# Altium PCB dspic30f2023.PcbDoc
Units mil, origin at the board's own origin, x right, y up, seen from the top; angles counter-clockwise.
Board outline 2885.83 x 1771.65 mil, 2 copper layers (Top Layer, Bottom Layer); 42 components, 52 nets, 185 pads, 57 vias.
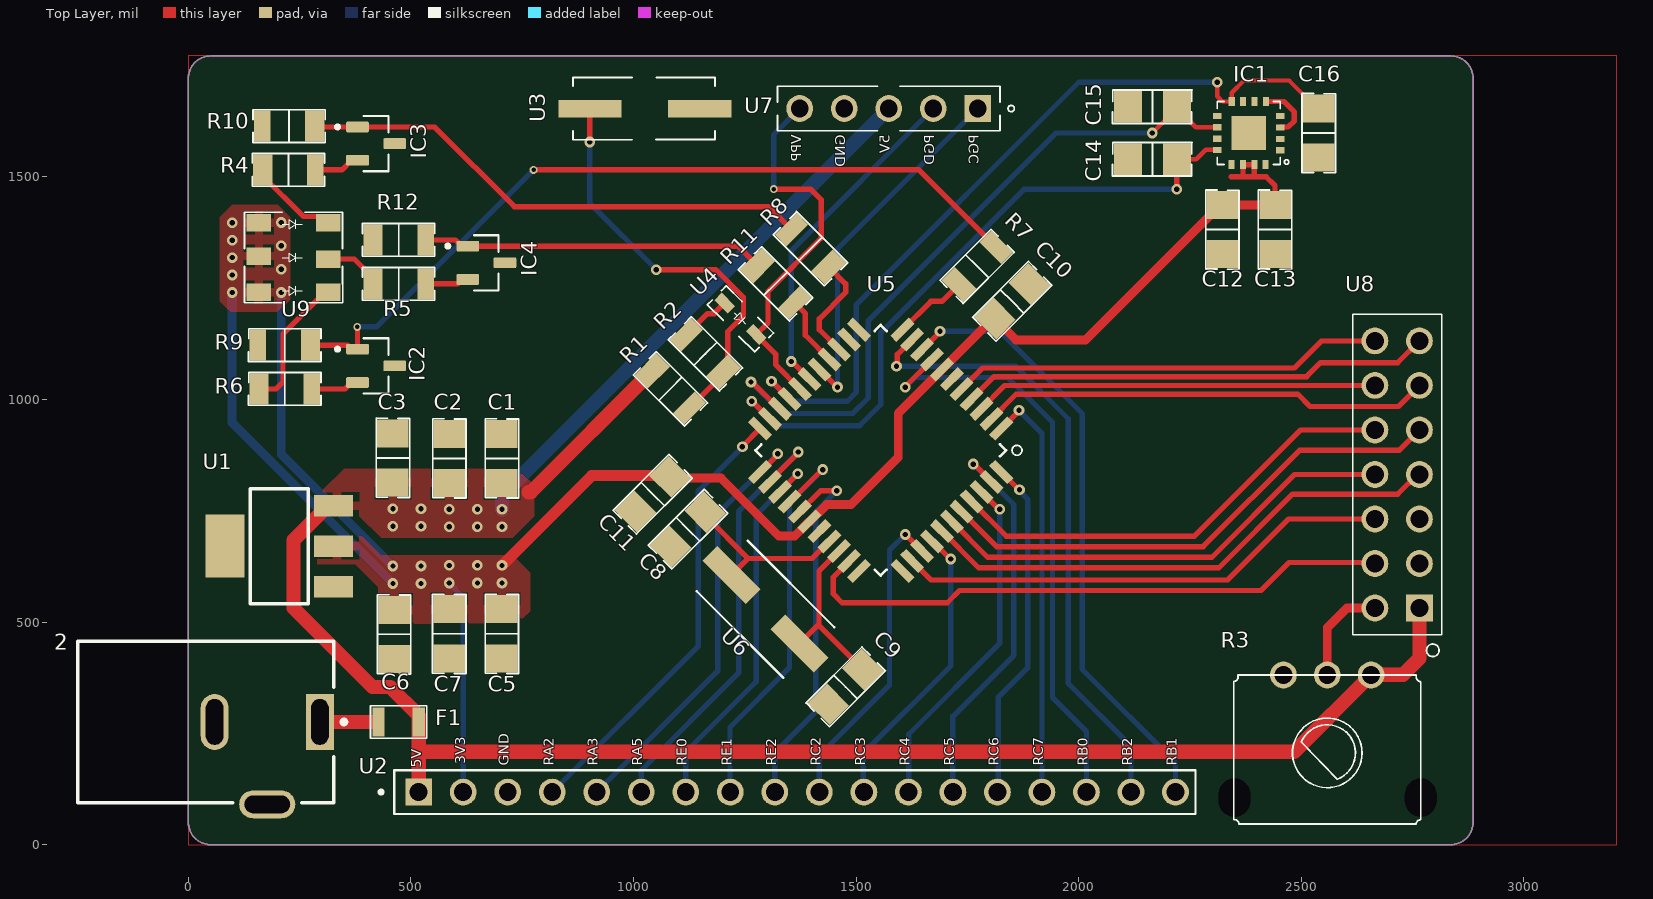
[diagram p0: Top Layer view]
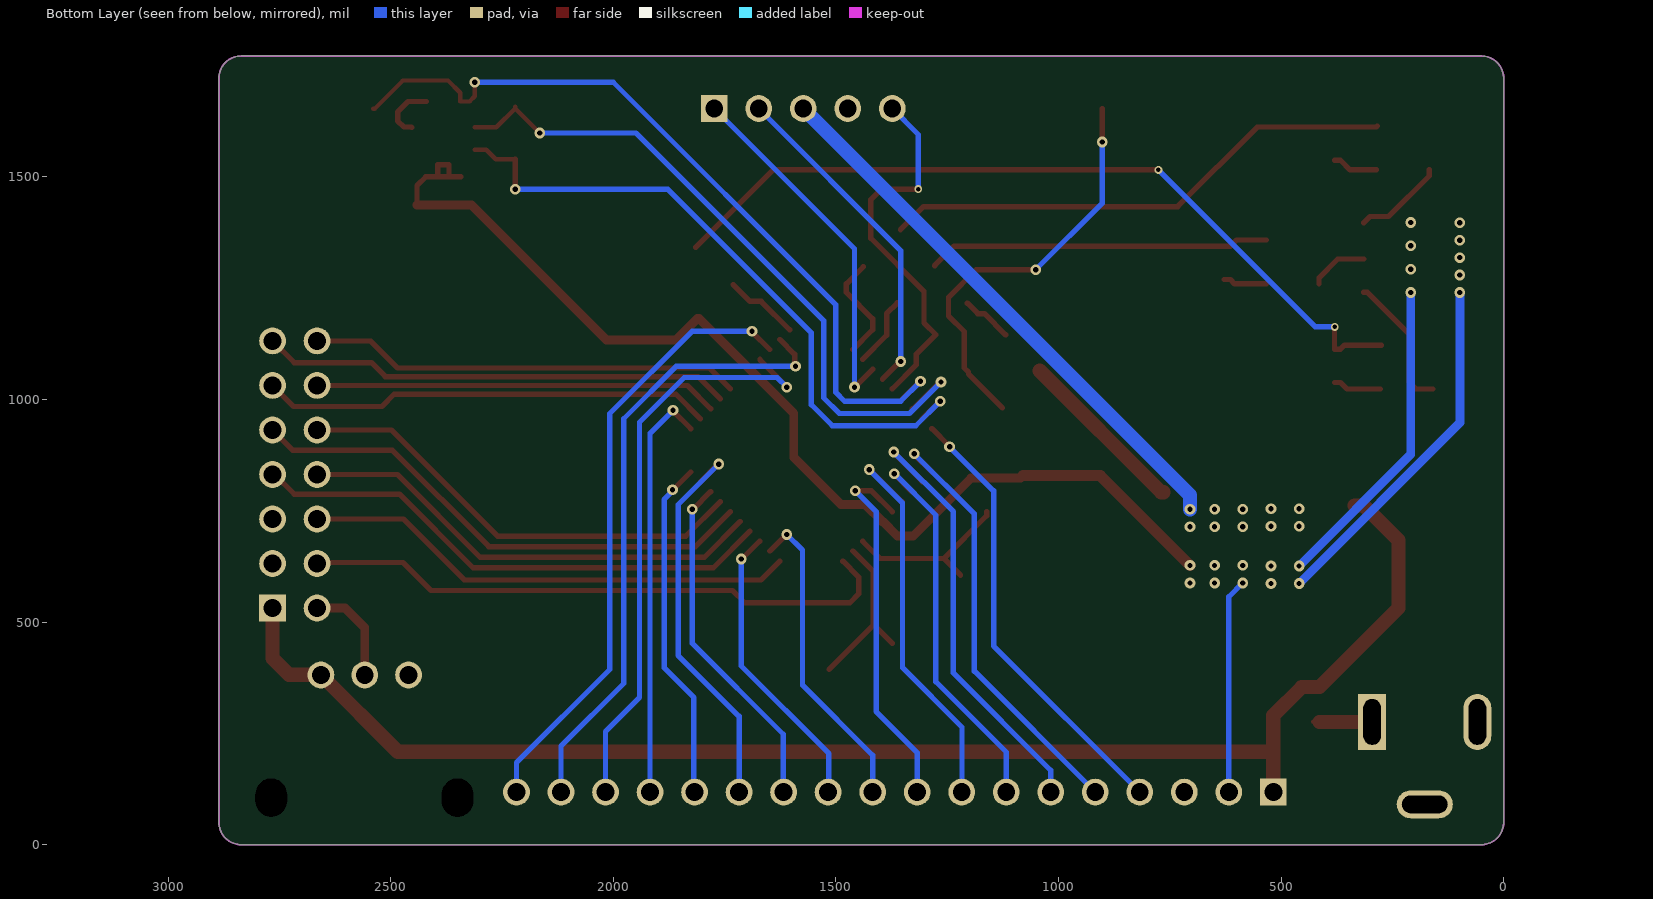
[diagram p1: Bottom Layer view, seen from below]
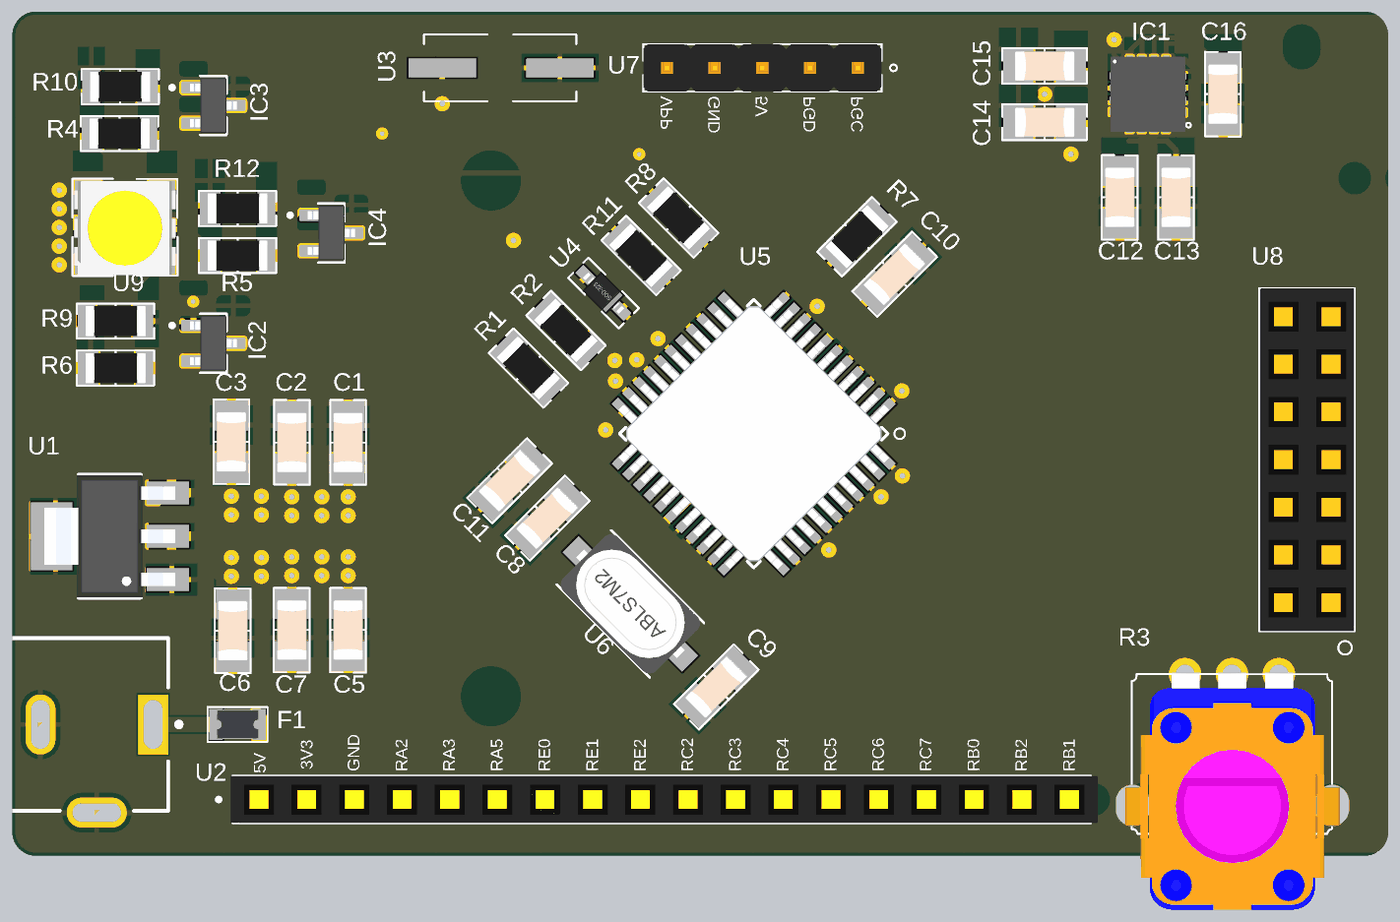
[diagram p2: 3D render of the assembled board from above, using the file's embedded part models]

## Layer stack, top to bottom
Top Solder: solder mask 0.4, Solder Resist, Dk 3.5
Top Layer: signal copper 1.4
Dielectric 1: dielectric 12.6, FR-4, Dk 4.8
Bottom Layer: signal copper 1.4
Bottom Solder: solder mask 0.4, Solder Resist, Dk 3.5

## Board outline
0,50 0,1721.65 cw(c50,1721.65) 50,1771.65 89.37,1771.65 90.55,1771.65 2835.83,1771.65 cw(c2835.83,1721.65) 2885.83,1721.65 2885.83,50 cw(c2835.83,50) 2835.83,0 118.11,0 50,0 cw(c50,50)

## Design rules (kind name [scope] priority, off if disabled: settings)
Clearance [All] p1: gap=4 ignorepadtopadclearanceinfootprint=FALSE
PolygonConnect [All] p1: thpad.connectstyle=Relief thpad.reliefconductorwidth=15.75 thpad.reliefentries=4 thpad.polygonreliefangle="90 Angle" thpad.airgapwidth=9.84 smdpad.connectstyle=Relief smdpad.reliefconductorwidth=19.68 smdpad.reliefentries=4 smdpad.polygonreliefangle="90 Angle" smdpad.airgapwidth=5.91 via.connectstyle=Direct via.reliefconductorwidth=10 via.reliefentries=4 via.polygonreliefangle="90 Angle" via.airgapwidth=10
RoutingVias [All] p1: holewidth=9.84 width=17.72 viastyle="Through Hole" minholewidth=7.87 minwidth=17.72 maxholewidth=39.37 maxwidth=62.99
SolderMaskExpansion [All] p1: expansion=4 istentingtop=FALSE
Width [All] p1: maxlimit=39.37 minlimit=4 preferedwidth=7.87
30 further rules are at their usual default settings.

## Classes and differential pairs
component class Sensor&Screen: C12 C13 C14 C15 C16 IC1 IC2 IC3 IC4 R3 R4 R5 R6 R7 R8 R9 R10 R11 R12 U8 U9
component class Power&USB: 2 C1 C2 C3 C5 C6 C7 C8 C9 C10 C11 F1 R1 R2 U1 U3 U4 U6
component class MCU-PINS: U2 U5 U7

## Components (designator, comment, footprint, x,y, rotation, side; value= is the part's Value field where it differs from the comment)
2 "PJ-102A" FP-PJ-102A-MFG 39.37,275.59 r90 top (schematic designator J1)
C1 "C" PCBComponent_1#1 704.33,867.44 r270 top
C2 "C" PCBComponent_1#1 586.22,867.44 r270 top
C3 "C" PCBComponent_1#1 459.45,868.74 r270 top
C5 "C" PCBComponent_1#1 704.33,473.74 r90 top
C6 "C" PCBComponent_1#1 462.44,472.44 r90 top
C7 "C" PCBComponent_1#1 586.22,473.74 r90 top
C8 "22pF" PCBComponent_1#1 1122.05,708.66 r225 top
C9 "22pF" PCBComponent_1#1 1476.38,354.33 r225 top
C10 "10uF" PCBComponent_1#1 1850.39,1220.47 r225 top
C11 "22uF" PCBComponent_1#1 1043.31,787.4 r45 top
C12 "10uF" PCBComponent_1#1 2322.83,1381.89 r90 top
C13 "10uF" PCBComponent_1#1 2440.94,1381.89 r90 top
C14 "0.1uF" PCBComponent_1#1 2165.35,1539.37 r0 top
C15 "0.1uF" PCBComponent_1#1 2165.35,1657.48 r0 top
C16 "0.1uF" PCBComponent_1#1 2539.37,1598.43 r90 top
F1 "FUSE" PCBComponent_1#2 472.44,275.59 r0 top
IC1 "ANALOG-ACCELOMETER" PCBComponent_1#3 2381.89,1598.43 r180 top
IC2 "BSS138-7-F" PCBComponent_1#4 421.69,1075.6 r0 top
IC3 "BSS138-7-F" PCBComponent_1#4 421.69,1574.8 r0 top
IC4 "BSS138-7-F" PCBComponent_1#4 669.3,1306.95 r0 top
R1 "10K" PCBComponent_1#5 1082.68,1023.62 r315 top
R2 "10K" PCBComponent_1#5 1161.42,1102.36 r135 top
R3 "POT-100K" PCBComponent_1#6 2559.06,228.35 r180 top
R4 "R" PCBComponent_1#5 224.84,1515.75 r0 top
R5 "R" PCBComponent_1#5 472.44,1259.84 r0 top
R6 "R" PCBComponent_1#5 216.54,1023.62 r0 top
R7 "R" PCBComponent_1#5 1771.65,1299.21 r45 top
R8 "R" PCBComponent_1#5 1397.64,1338.58 r135 top
R9 "R" PCBComponent_1#5 216.54,1122.05 r180 top
R10 "R" PCBComponent_1#5 226.22,1614.17 r180 top
R11 "R" PCBComponent_1#5 1318.9,1259.84 r315 top
R12 "R" PCBComponent_1#5 472.44,1358.27 r0 top
U1 "3.3V-REG" PCBComponent_1#7 204.33,670.59 r180 top
U2 "HEADER-FEMALE" PCBComponent_1#8 1367.32,118.11 r0 top
U3 "PUSH-BUTTON" PCBComponent_1#9 1023.62,1653.54 r0 top
U4 "DİODE-SOD-323" PCBComponent_1#10 1240.16,1181.1 r315 top
U5 "PIC18f452-TQFP" PCBComponent_1#11 1555.12,885.83 r225 top
U6 "Crystals-8MHz" PCBComponent_1#12 1299.21,531.5 r135 top
U7 "MALE-HEADER" PCBComponent_1#13 1573.23,1653.54 r180 top
U8 "LCD-DİSPLAY" PCBComponent_1#14 2715.36,831.5 r90 top
U9 "RGB-LED" PCBComponent_1#15 236.22,1318.9 r0 top

## Footprints (in the part's own frame and the unit in brackets; to place one, negate y for a bottom-side part, rotate by r counter-clockwise, add the part's x,y. Pads: shape width x height; smd on the part's side, far side on the other; paste and mask are expansions set on the pad)
FP-PJ-102A-MFG [mm]
  rect 3.2x1.6 hole 1 slot 2.6 at 0 deg paste-1000 mask+0: 1(0,-6.5)
  rrect100% 3.2x1.6 hole 1 slot 2.6 at 0 deg paste-1000 mask+0: 2(0,-0.5)
  rrect100% 1.6x3.2 hole 2.6 slot 1 at 0 deg paste-1000 mask+0: 3(-4.7,-3.5)
  silkscreen extent -4.6,-8 4.6,7.3
PCBComponent_1#1 [mm]
  rect 1.6x1.8 smd: 1(-1.4,0) 2(1.4,0)
  silkscreen extent -2.27,-0.95 2.26,0.95, body extent -1.6,-0.8 1.6,0.8, height 0.81
PCBComponent_1#2 [mm]
  rect 0.7x1.65 smd: 8(-1.15,0) 9(1.15,0)
  silkscreen extent -1.6,-0.92 1.6,0.93, body extent -1.1,-0.77 1.1,0.77, height 0.5
PCBComponent_1#3 [mm]
  rect 1.95x1.95 smd: 0(0,0)
  rect 0.5x0.35 smd: 1(-1.8,0.979) 2(-1.8,0.329) 3(-1.8,-0.321) 4(-1.8,-0.971) 9(1.8,-0.979) 10(1.8,-0.329) 11(1.8,0.321) 12(1.8,0.956)
  rect 0.35x0.5 smd: 5(-0.979,-1.8) 6(-0.329,-1.8) 7(0.321,-1.8) 8(0.971,-1.8) 13(0.979,1.8) 14(0.329,1.8) 15(-0.321,1.8) 16(-0.956,1.8)
  silkscreen extent -2.29,-1.8 1.8,1.8, body extent -2,-2 2,2, height 1.5
PCBComponent_1#4 [mm]
  rrect25% 1.3x0.61 smd: 1(-1.06,0.95) 2(-1.06,-0.95) 3(1.06,0)
  silkscreen extent -2.3,-1.58 0.7,1.58, body extent -1.25,-1.46 1.25,1.46, height 1.12
PCBComponent_1#5 [mm]
  rect 1.09x1.77 smd: 1(-1.465,0)
  rect 0.94x1.77 smd: 2(1.54,0)
  silkscreen extent -2.06,-0.93 2.06,0.93, body extent -1.6,-0.8 1.6,0.8, height 0.61
PCBComponent_1#6 [mm]
  round 1.53 hole 1.02: 1(-2.48,-3.881) 2(0.02,-3.881) 3(2.52,-3.881)
  rrect100% 0x0 hole 1.8 slot 2.2 at 90 deg: S3(-5.314,3.119) S3(5.314,3.119)
  Top Layer lines w0.1: -2.48,-3.881 -2.52,-3.881
  silkscreen extent -5.31,-3.89 5.36,4.63, body extent -5.7,-3.98 5.7,8.67, height 24.8
PCBComponent_1#7 [mm]
  rect 2.235x1.219 smd: 1(-3.099,2.311) 2(-3.099,0) 3(-3.099,-2.311)
  rect 2.2x3.6 smd: 1(3.099,0)
  silkscreen extent -1.65,-3.28 1.65,3.28, body extent -3.5,-3.25 3.5,3.25, height 1.8
PCBComponent_1#8 [mm]
  rect 1.53x1.53 hole 1.02: 1(-21.59,0)
  round 1.53 hole 1.02: 2(-19.05,0) 3(-16.51,0) 4(-13.97,0) 5(-11.43,0) 6(-8.89,0) 7(-6.35,0) 8(-3.81,0) 9(-1.27,0) 10(1.27,0) 11(3.81,0) 12(6.35,0) 13(8.89,0) 14(11.43,0) 15(13.97,0) 16(16.51,0) 17(19.05,0) 18(21.59,0)
  silkscreen extent -23.83,-1.25 22.73,1.25, body extent -23.11,-1.25 23.11,1.25, height 5
PCBComponent_1#9 [mm]
  rect 3.6x1 smd: 1(-3.092,0) 2(3.175,0)
  silkscreen extent -4.06,-1.78 4.05,1.78, body extent -4,-1.75 4,1.75, height 2.5
PCBComponent_1#10 [mm]
  rect 1.1x0.6 smd: 1(-1.27,0) 2(1.27,0)
  silkscreen extent -1.9,-0.76 1.9,0.76, body extent -1.35,-0.72 1.35,0.72, height 1.17
PCBComponent_1#11 [mm]
  rect 1.473x0.483 smd: 1(-5.74,3.988) 2(-5.74,3.2) 3(-5.74,2.388) 4(-5.74,1.6) 5(-5.74,0.787) 6(-5.74,0) 7(-5.74,-0.787) 8(-5.74,-1.6) 9(-5.74,-2.388) 10(-5.74,-3.2) 11(-5.74,-3.988) 23(5.74,-3.988) 24(5.74,-3.2) 25(5.74,-2.388) 26(5.74,-1.6) 27(5.74,-0.787) 28(5.74,0) 29(5.74,0.787) 30(5.74,1.6) 31(5.74,2.388) 32(5.74,3.2) 33(5.74,3.988)
  rect 0.483x1.473 smd: 12(-3.988,-5.74) 13(-3.2,-5.74) 14(-2.388,-5.74) 15(-1.6,-5.74) 16(-0.787,-5.74) 17(0,-5.74) 18(0.787,-5.74) 19(1.6,-5.74) 20(2.388,-5.74) 21(3.2,-5.74) 22(3.988,-5.74) 34(3.988,5.74) 35(3.2,5.74) 36(2.388,5.74) 37(1.6,5.74) 38(0.787,5.74) 39(0,5.74) 40(-0.787,5.74) 41(-1.6,5.74) 42(-2.388,5.74) 43(-3.2,5.74) 44(-3.988,5.74)
  silkscreen extent -5.78,-5.05 5.05,5.78, body extent -6,-6 6,6, height 1.19
PCBComponent_1#12 [mm]
  rect 3.5x1.2 smd: 1(-2.75,0.1) 2(2.75,0.1)
  silkscreen extent -3.5,-1.95 3.5,2.15, body extent -3.8,-1.95 3.8,2.15, height 1.9
PCBComponent_1#13 [mm]
  rect 1.53x1.53 hole 1.02: 1(-5.08,0)
  round 1.53 hole 1.02: 2(-2.54,0) 3(0,0) 4(2.54,0) 5(5.08,0)
  silkscreen extent -7.16,-1.27 6.35,1.27, body extent -6.35,-1.27 6.35,1.27, height 8.89
PCBComponent_1#14 [mm]
  rect 1.53x1.53 hole 1.02: 1(-7.62,-1.27)
  round 1.53 hole 1.02: 2(-7.62,1.27) 3(-5.08,-1.27) 4(-5.08,1.27) 5(-2.54,-1.27) 6(-2.54,1.27) 7(0,-1.27) 8(0,1.27) 9(2.54,-1.27) 10(2.54,1.27) 11(5.08,-1.27) 12(5.08,1.27) 13(7.62,-1.27) 14(7.62,1.27)
  silkscreen extent -10.39,-2.54 9.14,2.54, body extent -9.14,-2.52 9.14,2.48, height 8.5
PCBComponent_1#15 [mm]
  rect 1.4x1 smd: 1(1.976,-1.987) 2(1.978,-0.089) 3(1.973,1.988) 4(-1.976,1.987) 5(-1.976,0.082) 6(-1.98,-1.986)
  silkscreen extent -2.8,-2.58 2.8,2.59, body extent -2.7,-2.54 2.7,2.46, height 1.68

## Part data
2: library part CMP-2000-06899-2, "CONN PWR JACK 2X5.5MM SOLDER", Current Rating=2.5A, Manufacturer=CUI, Temperature="-25°C to +85°C", Temperature Range High=+85°C, Temperature Range Low=-25°C, Voltage=24V, Automotive=No, Category=Conn, ComponentLink2Description=Datasheet, ComponentLink2URL=http://www.cui.com/product/resource/pj-102a.pdf, Conn Gender=Male, Conn Orientation="Right Angle", Contact Material=Tin,Nickel, Device Class L1=Connectors, Device Class L2="Power Connectors", Device Class L3=unset, Digikey Description="CONN PWR JACK 2X5.5MM SOLDER", Height=11.2mm, Industry Recognized Mating Diameter="2.10mm ID (0.083\"), 5.50mm OD (0.217\")", Lead Free=Yes, Manufacturer Part Number=PJ-102A, Mouser Description="DC Power Connectors Power Jacks", Number Of Contacts=3, Number of Positions/Contacts="2 Conductors, 3 Contacts", Octopart=https://octopart.com/pj-102a-cui-286936, Package=PJ-102A, RoHS=TRUE, Voltage Rating=24V
C1 C2 C3 C5 C6 C7 C8 C9 C10 C11 C12 C13 C14 C15 C16: library part 1206-CAPACİTOR
F1 IC2 IC3 IC4: library part Component_1
IC1: library part ADXL33X
R1 R2 R4 R5 R6 R7 R8 R9 R10 R11 R12: library part 1206-RESİSTOR
R3: library part L-KLS4-R0902N-B100K-L25-
U1: library part LD1117AG-33-AA3-A-R
U2: library part L-KLS1-208B-4.0-1-18-S
U3: library part DS1042-03-2-1-KKA-160-10
U4: library part 1N4148WS-HT
U6: library part Crystals-8MHz-SMD
U7: library part 5-PINS-MALE-HEADER
U8: library part 0802A
U9: library part FYLS-5050NRGB

## Via types
v1: diameter 24, hole 11.81, Top Layer to Bottom Layer, 29 vias
v2: diameter 24, hole 12, Top Layer to Bottom Layer, 25 vias
v3: diameter 17.72, hole 9.84, Top Layer to Bottom Layer, 3 vias

## Nets (pads, with @x,y where several pads share a name; then routed paths per layer and width w, separated by ;. In a path a pad name is that pad's centre, name@x,y a point inside that pad or via, vN(x,y) a via of type N, cw(c..) or ccw(c..) an arc to the next point about the centre after c; other vN are vias at no path point)
3V3: C5.2 C6.2 C7.2 C10.2 C11.2 C12.2 C13.2 IC1.14 IC1.15 U1.2 U2.2 U5.7 U5.28 U9.4 U9.5 U9.6 | length 4514.6
  Top Layer w12: C10.2@1806.95,1181.5 C10.2 ; 2342.52,1500 2421.26,1500 2440.94,1480.32 C13.2 ; 2368.68,1501.35 2368.94,1501.6 IC1.14 IC1.15 2394.53,1500.89
  Top Layer w20: C11.2@1079.5,829.16 C11.2 1085.07,823.59 1196.09,823.59 1326.77,692.91 1361.5,692.91 1394.6,726.02 U5.28 1396.02,726.02 1433.78,763.78 1488.19,763.78 1594.49,870.08 1594.49,969.04 U5.7 C10.2@1806.95,1181.5 ; C10.2 1859.06,1133.86 2015.75,1133.86 2318.9,1437.01 C12.2 C13.2
  Top Layer w25: v1(704.33,627.28) 906.21,829.16 C11.2@1079.5,829.16
  Bottom Layer w12: v1(586.22,587.91) 617.32,556.81 U2.2
  Bottom Layer w20: v1(98.43,1240.16) 98.43,947.64 v1(459.45,586.61) ; v1(208.66,1240.16) 208.66,876.77 v1(459.45,625.98)
  other v1: 522.44,586.61 649.21,587.91 704.33,587.91 522.44,625.98 586.22,627.28 649.21,627.28 98.43,1279.4 208.66,1292.65 98.43,1318.64 208.66,1345.14 98.43,1357.88 98.43,1397.12 208.66,1397.64
BLUE_LED: R7.1 U5.11 | length 169.1
  Top Layer w12: U5.11 1667.73,1220.47 1692.91,1220.47 R7.1
D0: U5.38 U8.7 | length 1193.1
  Top Layer w12: U5.38 1775.06,622.05 2314.96,622.05 2480.31,787.4 2716.54,787.4 2760.63,831.5 U8.7
D1: U5.39 U8.8 | length 1060.7
  Top Layer w12: U5.39 1795.27,645.67 2299.21,645.67 2485.04,831.5 U8.8
D2: U5.40 U8.9 | length 1169.7
  Top Layer w12: U5.40 1815.49,669.29 2279.53,669.29 2496.06,885.83 2719.69,885.83 U8.9
D3: U5.41 U8.10 | length 1036.9
  Top Layer w12: U5.41 1837.13,692.91 2259.84,692.91 2498.43,931.5 U8.10
D4: U5.2 U8.11 | length 1015.2
  Top Layer w12: U5.2 1859.29,1011.81 2492.13,1011.81 2519.68,984.25 2718.11,984.25 U8.11
D5: U5.3 U8.12 | length 905.6
  Top Layer w12: U5.3 1833.72,1031.5 U8.12
D6: U5.4 U8.13 | length 1059.9
  Top Layer w12: U5.4 1809.57,1051.18 2511.81,1051.18 2543.31,1082.68 2716.54,1082.68 U8.13
D7: U5.5 U8.14 | length 973.2
  Top Layer w12: U5.5 1784,1070.87 2484.25,1070.87 2544.88,1131.5 U8.14
E: U5.35 U8.6 | length 1113.9
  Top Layer w12: U5.35 1668.26,594.49 2334.65,594.49 2471.65,731.5 U8.6
GND: 2.2 2.3 C1.1 C2.1 C3.1 C5.1 C6.1 C7.1 C8.2 C9.2 C10.1 C11.1 C12.1 C13.1 C14.1 C15.1 C16.1 IC1.3 IC1.5 IC1.6 IC1.7 IC2.3 IC3.3 IC4.3 R3.3 R9.2 R10.2 R12.1 U1.1 U2.3 U3.2 U5.6 U5.29 U7.4 U8.3 U8.5 | length 131
  Top Layer w12: IC1.5 2460.63,1669.29 2484.25,1645.67 2484.25,1625.98 2470.21,1611.94 2453.64,1611.94 IC1.3
GREEN_LED: R11.2 U5.15 | length 159.1
  Top Layer w12: R11.2 1385.83,1192.91 1385.83,1144.21 U5.15
NetC8_1: C8.1 U5.30 U6.2 | length 396.4
  Top Layer w12: C8.1 1161.02,738.99 1257.31,642.71 ; U6.2 1257.31,642.71 ; U5.30 1401.09,642.71 1257.31,642.71
NetC9_1: C9.1 U5.31 U6.1 | length 387.6
  Top Layer w12: U6.1 1416.72,495.89 ; U5.31 1416.72,614.49 1416.72,495.89 ; C9.1 1416.72,491.94 1416.72,495.89
NetF1_8: 2.1 F1.8 | length 118.1
  Top Layer w32: 2.1 413.38,275.59
NetIC2_1: IC2.1 R7.2 R9.1 | length 1812.8
  Top Layer w12: R9.1 357.33,1122.05 366.38,1113 IC2.1 379.96,1162.51 v3(379.47,1163) ; v3(775.59,1515.75) 1640.86,1515.75 R7.2
  Bottom Layer w12: v3(379.47,1163) 422.84,1163 v3(775.59,1515.75)
NetIC2_2: IC2.2 R6.2 | length 108.8
  Top Layer w12: R6.2 351.8,1023.62 366.38,1038.2 IC2.2
NetIC3_1: IC3.1 R8.2 R10.1 | length 1167.3
  Top Layer w12: R10.1 285.87,1612.2 IC3.1 553.15,1612.2 732.28,1433.07 1303.15,1433.07 R8.2
NetIC3_2: IC3.2 R4.2 | length 103.5
  Top Layer w12: R4.2 344.72,1515.75 366.38,1537.4 IC3.2
NetIC4_1: IC4.1 R11.1 R12.2 | length 768.9
  Top Layer w12: R12.2 600.07,1358.27 613.99,1344.35 IC4.1 1234.39,1344.35 R11.1
NetIC4_2: IC4.2 R5.2 | length 98.5
  Top Layer w12: R5.2 604.28,1259.84 613.99,1269.55 IC4.2
NetR1_2: R1.2 R2.1 U3.1 | length 944.5
  Top Layer w12: v2(901.89,1578.43) U3.1 ; v2(1051.18,1291.34) 1185.04,1291.34 1247,1229.38 1247,1187.94 1211.67,1152.61 1211.67,1071.04 R2.1 1202.2,1057.4 R1.2
  Bottom Layer w12: v2(901.89,1578.43) 901.89,1440.63 v2(1051.18,1291.34)
NetR2_2: R2.2 U4.1 | length 115.8
  Top Layer w12: R2.2 1166.22,1192.91 1181.1,1192.91 1204.65,1216.46 U4.1
NetR3_2: R3.2 U8.2 | length 231.6
  Top Layer w20: R3.2 2558.27,487.4 2602.36,531.5 U8.2
NetR4_1: R4.1 U9.3 | length 203.7
  Top Layer w12: R4.1 167.16,1502.36 258.69,1410.83 300.2,1410.83 U9.3
NetR5_1: R5.1 U9.2 | length 131.5
  Top Layer w12: U9.2 372.62,1315.38 414.76,1273.23 R5.1
NetR6_1: R6.1 U9.1 | length 308.2
  Top Layer w12: R6.1 196.85,1023.62 212.6,1039.37 212.6,1147.12 306.15,1240.67 U9.1
PGC: U5.16 U7.1 | length 812.4
  Top Layer w12: U5.16 v2@1456.97,1027.81
  Bottom Layer w12: v2(1458.21,1027.81) 1458.21,1338.53 U7.1
PGD: U5.17 U7.2 | length 756.5
  Top Layer w12: v2@1355.57,1085.37 U5.17
  Bottom Layer w12: v2(1354.33,1085.37) 1354.33,1334.64 U7.2
RA2/N2/VREF-: U2.4 U5.22 | length 1008.7
  Top Layer w12: v2@1244.55,894.88 U5.22
  Bottom Layer w12: U2.4 1145.67,446.46 1145.67,794.75 v2(1244.55,893.64)
RA3/AN3/VREF+: U2.5 U5.23 | length 984.6
  Top Layer w12: U5.23 v2@1324.04,876.78
  Bottom Layer w12: U2.5 1188.98,389.76 1188.98,742.96 v2(1324.04,878.02)
RA5/AN4/S\S\/LVDIN: U2.6 U5.24 | length 1003.1
  Top Layer w12: U5.24 1306.22,816.57 1370.08,880.43 v2(1370.08,881.89)
  Bottom Layer w12: U2.6 1017.32,166.93 1236.22,385.83 1236.22,748.03 v2(1370.08,881.89)
RB0/INT0: U2.16 U5.8 | length 1331.1
  Top Layer w12: v2(1610.24,1027.56) 1610.24,1028.8 1670.38,1088.94 U5.8
  Bottom Layer w12: v2(1610.24,1027.56) 1631.88,1049.2 1840.56,1049.2 1940.94,948.82 1940.94,330.71 2017.32,254.33 U2.16
RB1/INT1: U2.18 U5.9 | length 1389.3
  Top Layer w12: U5.9 v2@1688.2,1151.84
  Bottom Layer w12: v2(1688.2,1153.08) 1823.06,1153.08 2007.87,968.27 2007.87,393.7 2217.32,184.25 U2.18
RB2/INT2: U2.17 U5.10 | length 1406.3
  Top Layer w12: v2(1590.55,1074.8) 1592.59,1076.85 1592.59,1101.49 U5.10
  Bottom Layer w12: v2(1590.55,1074.8) 1858.27,1074.8 1976.38,956.69 1976.38,362.2 2117.32,221.26 U2.17
RC2/CCP1: U2.10 U5.36 | length 712.3
  Top Layer w12: v2(1610.24,696.85) 1610.7,696.85 1647.99,659.55 U5.36
  Bottom Layer w12: U2.10 1417.32,200.79 1574.8,358.27 1574.8,661.42 v2(1610.24,696.85)
RC3/SCK/SCL: U2.11 U5.37 | length 664.5
  Top Layer w12: U5.37 1671.62,681.47 1711.36,641.73 v2(1712.6,641.73)
  Bottom Layer w12: U2.11 1515.75,119.69 1515.75,204.72 1712.6,401.57 v2(1712.6,641.73)
RC4/SDI/SDA: U2.12 U5.42 | length 776.7
  Top Layer w12: U5.42 1781.39,792.95 v2@1821.13,753.21
  Bottom Layer w12: U2.12 1618.11,118.9 1618.11,248.03 1822.37,452.29 v2(1822.37,753.21)
RC5/SDO: U2.13 U5.43 | length 887.5
  Top Layer w12: v2@1764.28,854.86 U5.43
  Bottom Layer w12: U2.13 1717.32,288.19 1854.33,425.2 1854.33,763.56 v2(1763.04,854.86)
RC6/TX/CK: U2.14 U5.44 | length 771.6
  Top Layer w12: U5.44 v2@1865.68,797.3
  Bottom Layer w12: U2.14 1818.9,119.68 1818.9,330.71 1885.83,397.64 1885.83,775.14 1866.92,794.05 v2(1866.92,797.3)
RC7/RX/DT: U2.15 U5.1 | length 935.1
  Top Layer w12: U5.1 v2@1865.68,974.36
  Bottom Layer w12: v2(1865.68,975.6) 1917.32,923.95 U2.15
RE0/AN5/R\D\: U2.7 U5.25 | length 875.6
  Top Layer w12: U5.25 v2@1368.58,832.23
  Bottom Layer w12: U2.7 1117.32,207.88 1275.59,366.14 1275.59,740.48 v2(1368.58,833.47)
RE1/AN6/W\R\: U2.8 U5.26 | length 915.4
  Top Layer w12: U5.26 1352,770.57 1423.96,842.52 v2(1425.2,842.52)
  Bottom Layer w12: U2.8 1216.54,118.9 1216.54,263.78 1350.39,397.64 1350.39,767.72 v2(1425.2,842.52)
RE2/AN7/C\S\: U2.9 U5.27 | length 837.8
  Top Layer w12: U5.27 1420.73,795.28 v2(1456.69,795.28)
  Bottom Layer w12: U2.9 1317.32,207.09 1409.45,299.21 1409.45,748.03 v2(1456.69,795.28)
RED_LED: R8.1 U5.14 | length 244.3
  Top Layer w12: R8.1 1476.38,1259.84 1476.38,1240.16 1417.32,1181.1 1417.32,1156.56 U5.14
RS: U5.32 U8.4 | length 1351.8
  Top Layer w12: U5.32 1448.82,601.34 1448.82,562.99 1468.5,543.31 1704.72,543.31 1732.28,570.87 2409.45,570.87 2472.44,633.86 2662.99,633.86 U8.4
VBUS_FUSE: C1.2 C2.2 C3.2 F1.9 R1.1 R3.1 U1.3 U2.1 U7.3 U8.1 | length 4934.9
  Top Layer w32: U1.3@334.2,761.59 314.2,761.59 236.22,683.61 236.22,531.5 413.39,354.33 453.24,354.33 517.72,289.85 F1.9 517.52,275.39 517.52,208.66 ; U2.1 517.32,208.66 2484.21,208.66 R3.1 2657.44,381.89 2728.35,381.89 2765.36,418.9 U8.1 ; 763.78,791.34 768.83,791.34 R1.1
  Bottom Layer w32: v1(704.33,753.27) 704.33,784.65 U7.3
  other v1: 586.22,713.9 649.21,713.9 704.33,713.9 459.45,715.2 522.44,715.2 586.22,753.27 649.21,753.27 459.45,754.57 522.44,754.57
VPP: U4.2 U5.18 U7.5 | length 847.4
  Top Layer w12: v3(1314.96,1472.44) 1397.64,1472.44 1421.26,1448.82 1421.26,1362.2 1302.06,1243 1302.06,1172.13 1275.67,1145.75 U4.2 1319.8,1101.46 1319.8,1077.3 U5.18
  Bottom Layer w12: v3(1314.96,1472.44) 1314.96,1595.28 U7.5
XOUT: C14.2 IC1.12 U5.21 | length 1515.4
  Top Layer w10: C14.2 2263.78,1539.37 2285.2,1560.79 IC1.12
  Top Layer w12: v2@1266.48,996.28 U5.21 ; v2(2220.47,1472.44) C14.2
  Bottom Layer w12: v2(1265.23,996.28) 1320.57,940.94 1507.87,940.94 1555.12,988.19 1555.12,1149.61 1877.95,1472.44 v2(2220.47,1472.44)
YOUT: C15.2 IC1.10 U5.20 | length 1573.2
  Top Layer w10: v2(2165.35,1598.43) C15.2@2220.47,1653.54 ; C15.2 C15.2@2220.47,1653.54 ; IC1.10 2262.64,1611.38 C15.2@2220.47,1653.54
  Top Layer w12: v2(1263.78,1039.37) 1266.21,1039.37 1326.41,979.16 U5.20
  Bottom Layer w12: v2(1263.78,1039.37) 1334.65,968.5 1492.13,968.5 1527.56,1003.94 1527.56,1177.17 1948.82,1598.43 v2(2165.35,1598.43)
ZOUT: C16.2 IC1.8 U5.19 | length 1810
  Top Layer w10: v2(2311.02,1712.6) 2311.02,1681.1 2322.83,1669.29 IC1.8 2343.67,1688.94 2371.27,1716.54 2472.44,1716.54 2535.43,1653.54 C16.2
  Top Layer w12: v2@1311.02,1040.83 U5.19
  Bottom Layer w12: v2(1309.78,1040.83) 1354.54,996.06 1480.31,996.06 1500,1015.75 1500,1212.6 2000,1712.6 v2(2311.02,1712.6)
pads on no net: IC1.0 IC1.1 IC1.2 IC1.4 IC1.9 IC1.11 IC1.13 IC1.16 R3.S3 U5.12 U5.13 U5.33 U5.34

## Polygon pours and split planes (outlines as drawn)
3V3 on Top Layer "NONET_L01_P-001" (solid, pour order 4): 228.35,1409.45 228.35,1224.41 200.79,1196.85 94.49,1196.85 70.87,1220.47 70.87,1409.45 98.43,1437.01 200.79,1437.01
3V3 on Top Layer "NONET_L01_P-001" (solid, pour order 3): 337.89,694.45 388.23,694.45 433.07,649.61 728.35,649.61 767.72,610.24 767.72,524.76 740.25,497.29 427.01,496.02 427.01,578.73 374.81,629.49 289.91,629.49 289.91,694.57 338.2,694.57
VBUS_FUSE on Top Layer "NONET_L01_P-001" (solid, pour order 2): 290.21,737.43 290.42,737.64 384.41,737.64 433.07,688.98 728.35,688.98 777.14,737.77 777.14,806.82 739.36,844.6 349.78,844.6 290.15,784.98 290.15,737.52
GND on Top Layer "NONET_L01_P-001" (solid, shelved, pour order 0): 0,1771.65 0,0 3208.66,0 3208.66,1771.65

## Keep-outs
Keep-Out Layer:
  lines w3.94: 89.37,1771.65 50,1771.65 ccw(c50,1721.65) 0,1721.65 0,1673.23 0,137.8 0,50 ccw(c50,50) 50,0 118.11,0 2835.83,0 ccw(c2835.83,50) 2885.83,50 2885.83,1721.65 ccw(c2835.83,1721.65) 2835.83,1771.65 90.55,1771.65

## Silkscreen, mask and mechanical layers (free items; w line width, h text height)
Top Overlay:
  text "VPP" at 1384.25,1594.45 h40 r90
  text "GND" at 1483.81,1594.49 h40 r90
  text "5V" at 1583.81,1594.49 h40 r90
  text "PGD" at 1683.81,1594.49 h40 r90
  text "PGC" at 1783.81,1594.49 h40 r90
  text "3V3" at 629.48,181.1 h40 r90
  text "GND" at 727.9,177.17 h40 r90
  text "RA2" at 828.35,177.17 h40 r90
  text "RA3" at 927.9,177.17 h40 r90
  text "RA5" at 1027.9,177.17 h40 r90
  text "RE0" at 1127.9,177.17 h40 r90
  text "RE1" at 1228.35,177.17 h40 r90
  text "RE2" at 1328.35,177.17 h40 r90
  text "RC2" at 1427.9,177.17 h40 r90
  text "RC3" at 1527.9,177.17 h40 r90
  text "RC4" at 1627.9,177.17 h40 r90
  text "RC5" at 1727.9,177.17 h40 r90
  text "RC6" at 1827.9,177.17 h40 r90
  text "RC7" at 1927.9,177.17 h40 r90
  text "RB0" at 2027.9,177.17 h40 r90
  text "RB2" at 2128.35,177.17 h40 r90
  text "RB1" at 2228.35,177.17 h40 r90
  text "5V" at 531.05,173.23 h40 r90